# Altium PCB LPCB278R0__ASCII.PcbDoc
Units mm, origin at the board's own origin, x right, y up, seen from the top; angles counter-clockwise.
Board outline 96 x 79 mm, 2 copper layers (Top Layer, Bottom Layer); 75 components, 36 nets, 248 pads, 0 vias.
Unrouted connection lines stored in the file: 98.
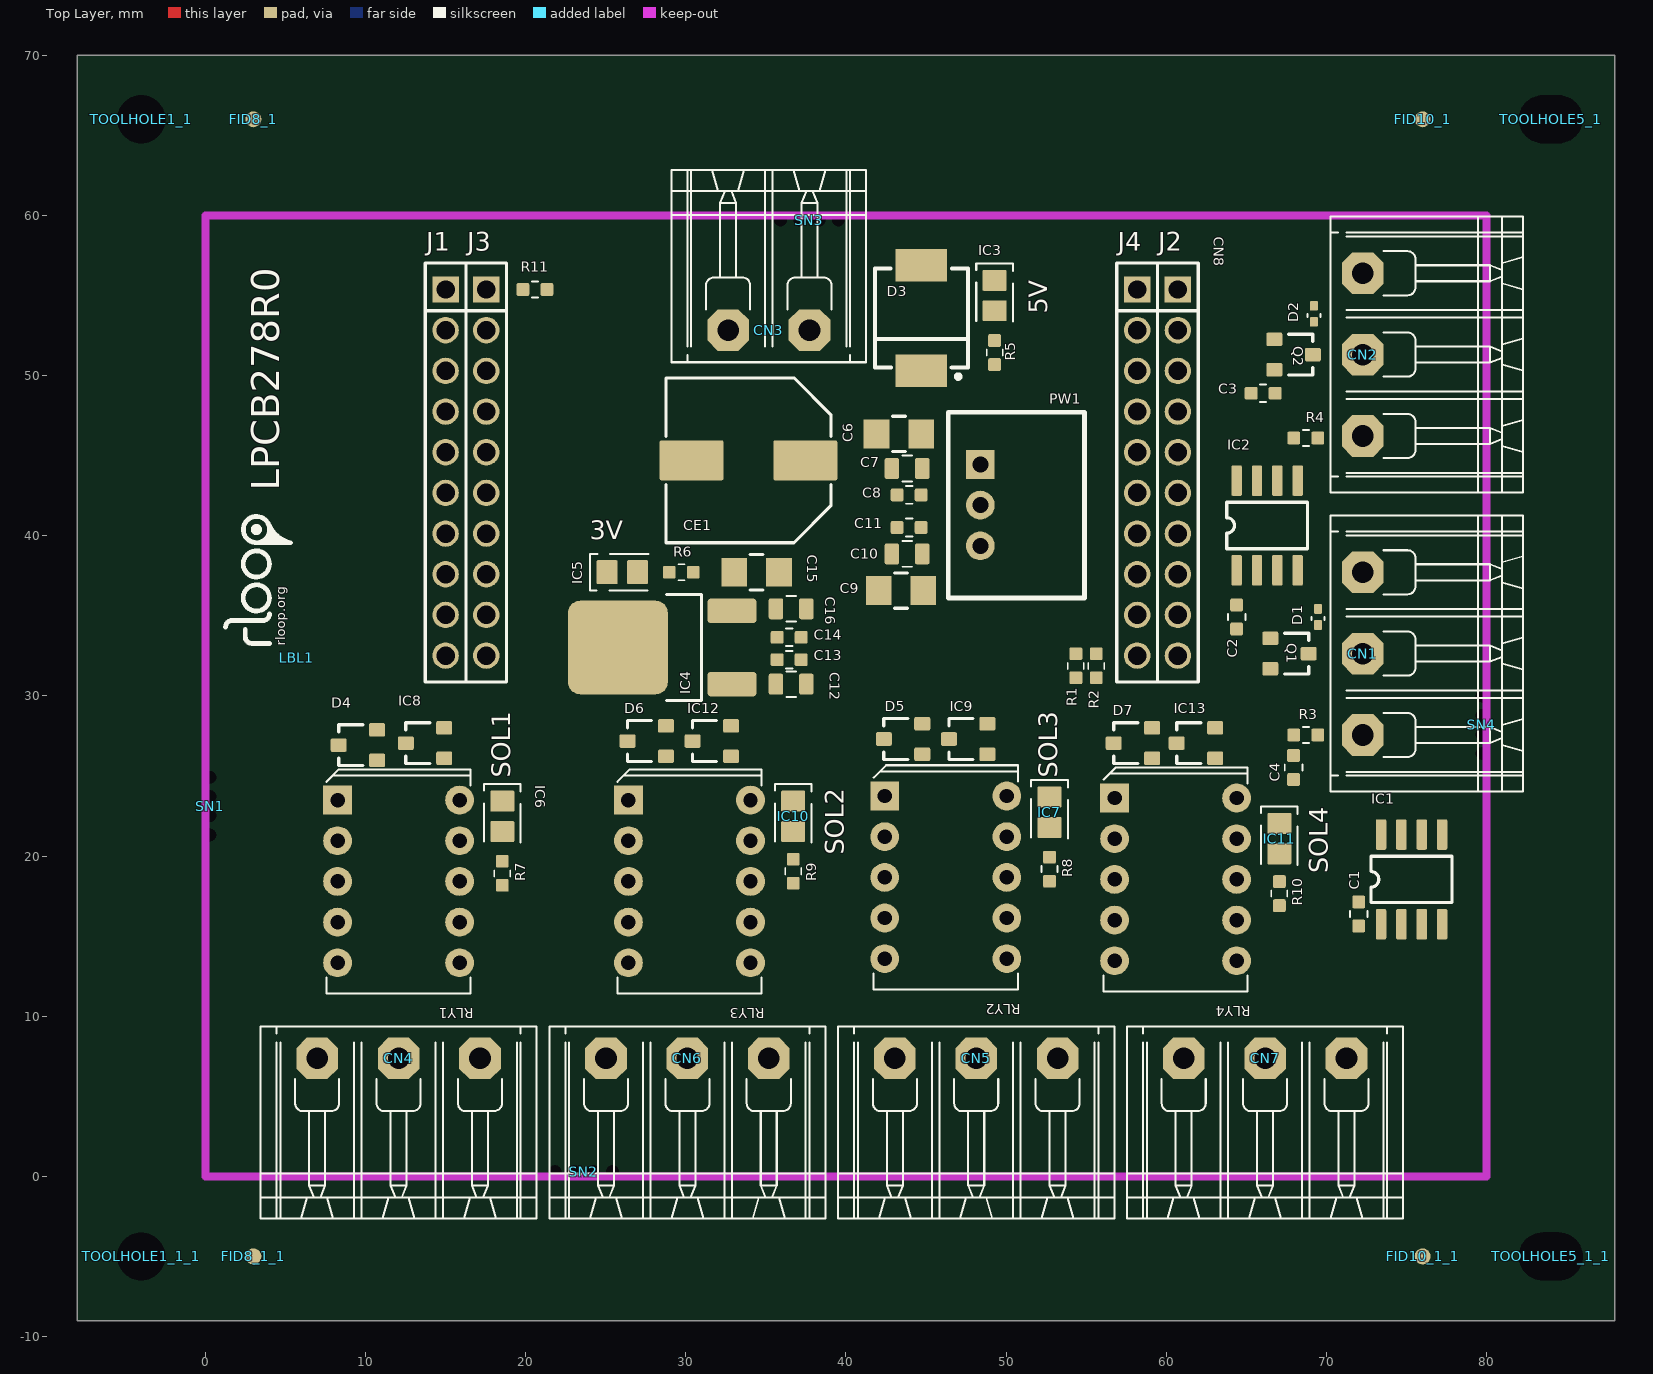
[diagram p0: Top Layer view]
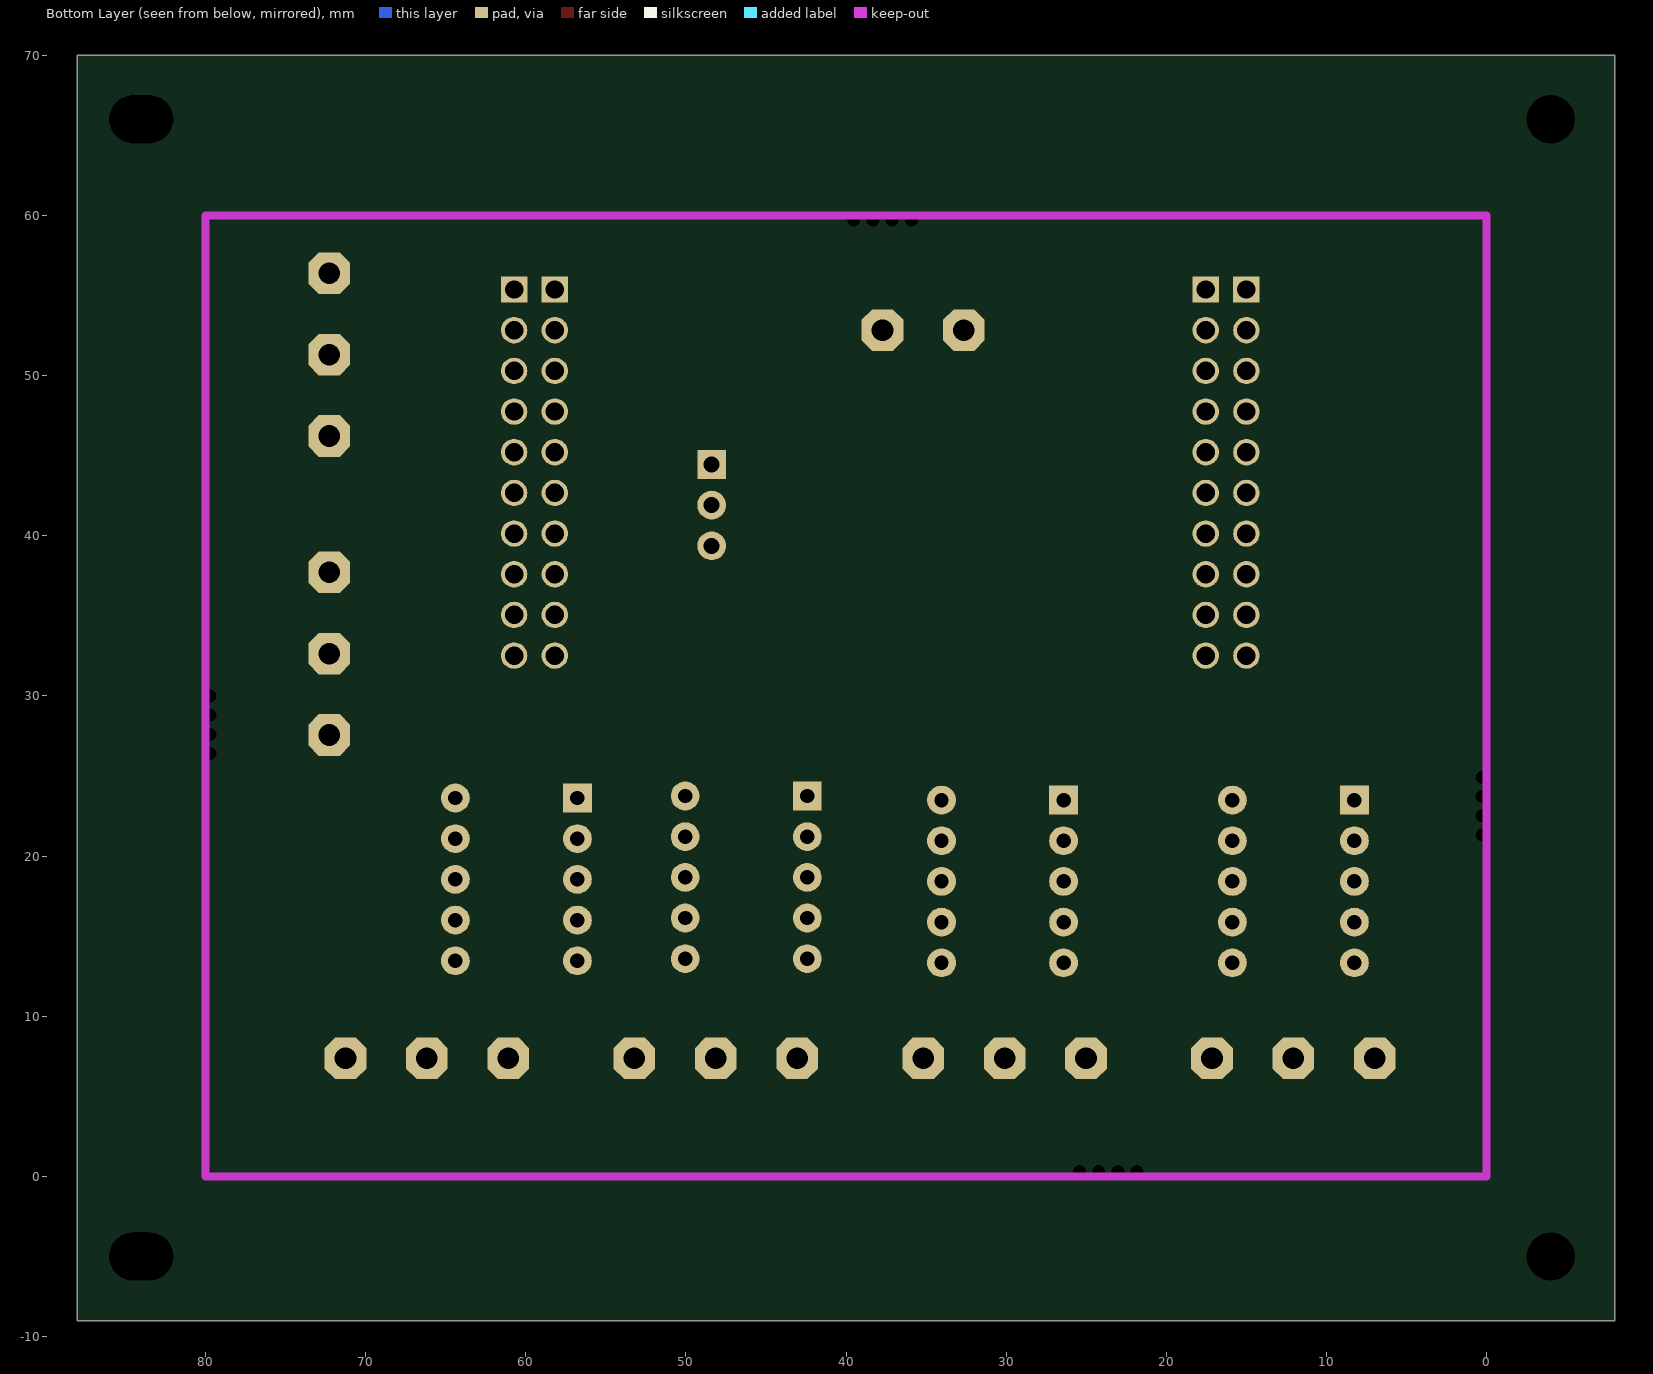
[diagram p1: Bottom Layer view, seen from below]

## Layer stack, top to bottom
Top Layer: signal copper 0.0356
Dielectric: dielectric 0.32, FR-4, Dk 4.8
Bottom Layer: signal copper 0.0356

## Board outline
-8,-9 -8,70 88,70 88,-9

## Design rules (kind name [scope] priority, off if disabled: settings)
AssemblyTestPointUsage [All] p0: scope1count=1 scope1_0_kind=Board scope1_0_value=Board scope2count=1 scope2_0_kind=Board scope2_0_value=Board commentlength=0
AssemblyTestpoint [All] p0: scope1count=1 scope1_0_kind=Board scope1_0_value=Board scope2count=1 scope2_0_kind=Board scope2_0_value=Board commentlength=0
Clearance [All] p0: scope1count=1 scope1_0_kind=Board scope1_0_value=Board scope2count=1 scope2_0_kind=Board scope2_0_value=Board commentlength=0 gap=0.16
Clearance [All] p1: gap=0.16
ComponentClearance [All] p0: scope1count=1 scope1_0_kind=Board scope1_0_value=Board scope2count=1 scope2_0_kind=Board scope2_0_value=Board commentlength=0 gap=0.254 collisioncheckmode=3
DiffPairsRouting [All] p0: scope1count=1 scope1_0_kind=Board scope1_0_value=Board scope2count=1 scope2_0_kind=Board scope2_0_value=Board commentlength=0
FabricationTestPointUsage [All] p0: scope1count=1 scope1_0_kind=Board scope1_0_value=Board scope2count=1 scope2_0_kind=Board scope2_0_value=Board commentlength=0 valid=0 allowmultiple=FALSE
FabricationTestpoint [All] p0: scope1count=1 scope1_0_kind=Board scope1_0_value=Board scope2count=1 scope2_0_kind=Board scope2_0_value=Board commentlength=0 side=3 testpointundercomponent=TRUE minsize=1.016 maxsize=2.54 preferedsize=1.524 minholesize=0 maxholesize=1.016 preferedholesize=0.813 testpointgrid=0.025
FanoutControl Fanout_Default [All] p0: scope1count=1 scope1_0_kind=Board scope1_0_value=Board scope2count=1 scope2_0_kind=Board scope2_0_value=Board commentlength=30 // Fanout_Default (Default Rule)
FanoutControl Fanout_Small [All] p0 off: scope1count=1 scope1_0_kind=Board scope1_0_value=Board scope2count=1 scope2_0_kind=Board scope2_0_value=Board commentlength=84 // Protel DXP Scope 1 Expression Was: (CompPinCount < 5)   Fanout_Small (Default Rule)
FanoutControl Fanout_SOIC [All] p0 off: scope1count=1 scope1_0_kind=Board scope1_0_value=Board scope2count=1 scope2_0_kind=Board scope2_0_value=Board commentlength=71 // Protel DXP Scope 1 Expression Was: IsSOIC   Fanout_SOIC (Default Rule)
FanoutControl Fanout_LCC [All] p0 off: scope1count=1 scope1_0_kind=Board scope1_0_value=Board scope2count=1 scope2_0_kind=Board scope2_0_value=Board commentlength=69 // Protel DXP Scope 1 Expression Was: IsLCC   Fanout_LCC (Default Rule)
FanoutControl Fanout_BGA [All] p0 off: scope1count=1 scope1_0_kind=Board scope1_0_value=Board scope2count=1 scope2_0_kind=Board scope2_0_value=Board commentlength=69 // Protel DXP Scope 1 Expression Was: IsBGA   Fanout_BGA (Default Rule)
Height [All] p0 off: scope1count=1 scope1_0_kind=Board scope1_0_value=Board scope2count=1 scope2_0_kind=Board scope2_0_value=Board commentlength=0
Height [All] p1 off: minheight=0 maxheight=25.4 prefheight=12.7
HoleSize [All] p0: scope1count=1 scope1_0_kind=Board scope1_0_value=Board scope2count=1 scope2_0_kind=Board scope2_0_value=Board commentlength=0 absolutevalues=TRUE maxlimit=6 minlimit=0.025 maxpercent=80.000 minpercent=20.000
HoleSize [All] p1: absolutevalues=TRUE maxlimit=6 minlimit=0.025 maxpercent=80.000 minpercent=20.000
HoleToHoleClearance [All] p0: scope1count=1 scope1_0_kind=Board scope1_0_value=Board scope2count=1 scope2_0_kind=Board scope2_0_value=Board commentlength=0
LayerPairs [All] p0: scope1count=1 scope1_0_kind=Board scope1_0_value=Board scope2count=1 scope2_0_kind=Board scope2_0_value=Board commentlength=0 enforce=TRUE
MinimumSolderMaskSliver [All] p0 off: scope1count=1 scope1_0_kind=Board scope1_0_value=Board scope2count=1 scope2_0_kind=Board scope2_0_value=Board commentlength=0
MinimumSolderMaskSliver [All] p1 off: minsoldermaskwidth=0.1
NetAntennae [All] p0: scope1count=1 scope1_0_kind=Board scope1_0_value=Board scope2count=1 scope2_0_kind=Board scope2_0_value=Board commentlength=0
PasteMaskExpansion [All] p0: scope1count=1 scope1_0_kind=Board scope1_0_value=Board scope2count=1 scope2_0_kind=Board scope2_0_value=Board commentlength=0 expansion=0
PlaneClearance [All] p0: scope1count=1 scope1_0_kind=Board scope1_0_value=Board scope2count=1 scope2_0_kind=Board scope2_0_value=Board commentlength=0 clearance=0.508
PlaneConnect [All] p0: scope1count=1 scope1_0_kind=Board scope1_0_value=Board scope2count=1 scope2_0_kind=Board scope2_0_value=Board commentlength=0 planeconnectstyle=Relief reliefexpansion=0.508 reliefentries=4 reliefconductorwidth=0.254 reliefairgap=0.254
PlaneConnect PlaneConnect_1 [All] p0 off: scope1count=1 scope1_0_kind=Board scope1_0_value=Board scope2count=1 scope2_0_kind=Board scope2_0_value=Board commentlength=44 planeconnectstyle=Direct reliefexpansion=0.508 reliefentries=4 reliefconductorwidth=0.254 reliefairgap=0.254 // Protel DXP Scope 1 Expression Was: IsVia
PlaneConnect PlaneConnect_1 [IsVia] p1: planeconnectstyle=Direct reliefexpansion=0.508 reliefentries=4 reliefconductorwidth=0.254 reliefairgap=0.254
PlaneConnect [All] p2: planeconnectstyle=Relief reliefexpansion=0.508 reliefentries=4 reliefconductorwidth=0.254 reliefairgap=0.254
PolygonConnect PolygonConnect_1 [All] p0: scope1count=1 scope1_0_kind=Board scope1_0_value=Board scope2count=1 scope2_0_kind=Board scope2_0_value=Board commentlength=0 connectstyle=Direct reliefconductorwidth=0.254 reliefentries=4 polygonreliefangle="90 Angle"
PolygonConnect [All] p0 off: scope1count=1 scope1_0_kind=Board scope1_0_value=Board scope2count=1 scope2_0_kind=Board scope2_0_value=Board commentlength=44 connectstyle=Direct reliefconductorwidth=0.254 reliefentries=4 polygonreliefangle="90 Angle" // Protel DXP Scope 1 Expression Was: IsVia
PolygonConnect [IsVia] p1: connectstyle=Direct reliefconductorwidth=0.254 reliefentries=4 polygonreliefangle="90 Angle" airgapwidth=0.254
PolygonConnect PolygonConnect_1 [All] p2: connectstyle=Direct reliefconductorwidth=0.254 reliefentries=4 polygonreliefangle="90 Angle" airgapwidth=0.254
RoomDefinition "U_LPCB278 - RM57 LAUNCH" [All] p0: scope1count=1 scope1_0_kind=ComponentClass scope1_0_value="U_LPCB278 - RM57 LAUNCH" scope2count=1 scope2_0_kind=Board scope2_0_value=Board commentlength=0 region_x1=127450000 region_y1=67650000 region_x2=141600000 region_y2=87450000 confinementstyle=ConfineIn
RoomDefinition "U_LPCB278 - RELAYS" [All] p0: scope1count=1 scope1_0_kind=ComponentClass scope1_0_value="U_LPCB278 - RELAYS" scope2count=1 scope2_0_kind=Board scope2_0_value=Board commentlength=0 region_x1=127500000 region_y1=60100000 region_x2=193550000 region_y2=67700000 confinementstyle=ConfineIn
RoomDefinition "U_LPCB278 - POWER" [All] p0: scope1count=1 scope1_0_kind=ComponentClass scope1_0_value="U_LPCB278 - POWER" scope2count=1 scope2_0_kind=Board scope2_0_value=Board commentlength=0 region_x1=127500000 region_y1=54700000 region_x2=167850000 region_y2=60200000 confinementstyle=ConfineIn
RoomDefinition "U_LPCB278 - 1 WIRE" [All] p0: scope1count=1 scope1_0_kind=ComponentClass scope1_0_value="U_LPCB278 - 1 WIRE" scope2count=1 scope2_0_kind=Board scope2_0_value=Board commentlength=0 region_x1=127450000 region_y1=46600000 region_x2=157900000 region_y2=54200000 confinementstyle=ConfineIn
RoomDefinition "LPCB278 - TOP" [All] p0: scope1count=1 scope1_0_kind=ComponentClass scope1_0_value="LPCB278 - TOP" scope2count=1 scope2_0_kind=Board scope2_0_value=Board commentlength=0 region_x1=127500000 region_y1=44200000 region_x2=129750000 region_y2=46700000 confinementstyle=ConfineIn
RoomDefinition "U_LPCB278 - RM57 LAUNCH" [InComponentClass('U_LPCB278 - RM57 LAUNCH')] p1: confinementstyle=ConfineIn formatcopy=TRUE lockcomponents=FALSE outline 169.038,50.563 204.979,50.563 204.979,100.855 169.038,100.855
RoomDefinition "U_LPCB278 - RELAYS" [InComponentClass('U_LPCB278 - RELAYS')] p2: confinementstyle=ConfineIn formatcopy=TRUE lockcomponents=FALSE outline 169.165,31.386 336.932,31.386 336.932,50.69 169.165,50.69
RoomDefinition "U_LPCB278 - POWER" [InComponentClass('U_LPCB278 - POWER')] p3: confinementstyle=ConfineIn formatcopy=TRUE lockcomponents=FALSE outline 169.165,17.67 271.654,17.67 271.654,31.64 169.165,31.64
RoomDefinition "U_LPCB278 - 1 WIRE" [InComponentClass('U_LPCB278 - 1 WIRE')] p4: confinementstyle=ConfineIn formatcopy=TRUE lockcomponents=FALSE outline 169.038,-2.904 246.381,-2.904 246.381,16.4 169.038,16.4
RoomDefinition "LPCB278 - TOP" [InComponentClass('LPCB278 - TOP')] p5: confinementstyle=ConfineIn formatcopy=TRUE lockcomponents=FALSE outline 169.165,-9 174.88,-9 174.88,-2.65 169.165,-2.65
RoutingCorners [All] p0: scope1count=1 scope1_0_kind=Board scope1_0_value=Board scope2count=1 scope2_0_kind=Board scope2_0_value=Board commentlength=0 cornerstyle=45-Degree minsetback=2.54 maxsetback=2.54
RoutingLayers [All] p0: scope1count=1 scope1_0_kind=Board scope1_0_value=Board scope2count=1 scope2_0_kind=Board scope2_0_value=Board commentlength=0 top layer=Automatic bottom layer=Automatic
RoutingPriority [All] p0: scope1count=1 scope1_0_kind=Board scope1_0_value=Board scope2count=1 scope2_0_kind=Board scope2_0_value=Board commentlength=0
RoutingTopology [All] p0: scope1count=1 scope1_0_kind=Board scope1_0_value=Board scope2count=1 scope2_0_kind=Board scope2_0_value=Board commentlength=0 topology=Shortest
RoutingVias [All] p0: scope1count=1 scope1_0_kind=Board scope1_0_value=Board scope2count=1 scope2_0_kind=Board scope2_0_value=Board commentlength=0 holewidth=0.6 width=1.2 viastyle="Through Hole" minholewidth=0.3 minwidth=0.6 maxholewidth=1 maxwidth=2
RoutingVias [All] p1: holewidth=0.6 width=1.2 viastyle="Through Hole" minholewidth=0.3 minwidth=0.6 maxholewidth=1 maxwidth=2
ShortCircuit [All] p0: scope1count=1 scope1_0_kind=Board scope1_0_value=Board scope2count=1 scope2_0_kind=Board scope2_0_value=Board commentlength=0 allowed=FALSE
SilkToSilkClearance [All] p0 off: scope1count=1 scope1_0_kind=Board scope1_0_value=Board scope2count=1 scope2_0_kind=Board scope2_0_value=Board commentlength=0
SilkToSilkClearance [All] p1 off: silktosilkclearance=0.1
SilkToSolderMaskClearance [All] p0 off: scope1count=1 scope1_0_kind=Board scope1_0_value=Board scope2count=1 scope2_0_kind=Board scope2_0_value=Board commentlength=44 // Protel DXP Scope 1 Expression Was: IsPad
SilkToSolderMaskClearance [IsPad] p1 off: minsilkscreentomaskgap=0.1 clearancetoexposedcopper=TRUE
SolderMaskExpansion [All] p0: scope1count=1 scope1_0_kind=Board scope1_0_value=Board scope2count=1 scope2_0_kind=Board scope2_0_value=Board commentlength=0 expansion=0.102
SolderMaskExpansion [All] p1: expansion=0.102
UnRoutedNet [All] p0: scope1count=1 scope1_0_kind=Board scope1_0_value=Board scope2count=1 scope2_0_kind=Board scope2_0_value=Board commentlength=0
Width [All] p0: scope1count=1 scope1_0_kind=Board scope1_0_value=Board scope2count=1 scope2_0_kind=Board scope2_0_value=Board commentlength=0 maxlimit=1 minlimit=0.16 preferedwidth=0.2
Width [All] p1: maxlimit=1 minlimit=0.16 preferedwidth=0.2
22 further rules are at their usual default settings.

## Classes and differential pairs
component class "U_LPCB278 - RM57 LAUNCH": CN8 R11
component class "U_LPCB278 - RELAYS": CN4 CN5 CN6 CN7 D4 D5 D6 D7 IC6 IC7 IC8 IC9 IC10 IC11 IC12 IC13 R7 R8 R9 R10 RLY1 RLY2 RLY3 RLY4
component class "U_LPCB278 - POWER": C6 C7 C8 C9 C10 C11 C12 C13 C14 C15 C16 CE1 CN3 D3 IC3 IC4 IC5 PW1 R5 R6
component class "U_LPCB278 - 1 WIRE": C1 C2 C3 C4 CN1 CN2 D1 D2 IC1 IC2 Q1 Q2 R1 R2 R3 R4
component class "LPCB278 - TOP": LBL1 SN1 SN2 SN3 SN4

## Components (designator, comment, footprint, x,y, rotation, side; value= is the part's Value field where it differs from the comment)
C1 "100n / 50V / 10% / SMD 0603" LFP011__CC1608-0603-IPC7351_B 72.009,16.383 r90 top
C2 "100n / 50V / 10% / SMD 0603" LFP011__CC1608-0603-IPC7351_B 64.389,34.925 r270 top
C3 "1uF / 10V / 10% / SMD 0603" LFP011__CC1608-0603-IPC7351_B 66.04,48.895 r180 top
C4 "1uF / 10V / 10% / SMD 0603" LFP011__CC1608-0603-IPC7351_B 67.945,25.527 r270 top
C6 "10uF / 50V / 10% / SMD 1206" LFP043__CC3216-1206 43.307,46.355 r180 top
C7 "1uF / 50V / 10% / SMD 0805" LFP010__CC2012-0805-IPC7351_B 43.815,44.196 r180 top
C8 "100nF / 50V / 10% / SMD 0603" LFP011__CC1608-0603-IPC7351_B 43.942,42.545 r180 top
C9 "10uF / 50V / 10% / SMD 1206" LFP043__CC3216-1206 43.434,36.576 r180 top
C10 "1uF / 50V / 10% / SMD 0805" LFP010__CC2012-0805-IPC7351_B 43.815,38.862 r180 top
C11 "100nF / 50V / 10% / SMD 0603" LFP011__CC1608-0603-IPC7351_B 43.942,40.513 r180 top
C12 "1uF / 50V / 10% / SMD 0805" LFP010__CC2012-0805-IPC7351_B 36.576,30.734 r0 top
C13 "100nF / 50V / 10% / SMD 0603" LFP011__CC1608-0603-IPC7351_B 36.449,32.258 r0 top
C14 "100nF / 50V / 10% / SMD 0603" LFP011__CC1608-0603-IPC7351_B 36.449,33.655 r0 top
C15 "10uF / 50V / 10% / SMD 1206" LFP043__CC3216-1206 34.417,37.719 r0 top
C16 "1uF / 50V / 10% / SMD 0805" LFP010__CC2012-0805-IPC7351_B 36.576,35.433 r0 top
CE1 "330uF / 35V / 20% / SMD 10x10" LFP041__NICHICON_WT_10X10 33.909,44.704 r180 top
CN1 "691 313 510 003" "691 313 510 003" 72.263,27.559 r90 top locked
CN2 "691 313 510 003" "691 313 510 003" 72.263,46.228 r90 top locked
CN3 "691 313 510 002" "691 313 510 002" 37.719,52.832 r180 top
CN4 "691 313 510 003" "691 313 510 003" 6.985,7.366 r0 top locked
CN5 "691 313 510 003" "691 313 510 003" 43.053,7.366 r0 top locked
CN6 "691 313 510 003" "691 313 510 003" 25.019,7.366 r0 top locked
CN7 "691 313 510 003" "691 313 510 003" 61.087,7.366 r0 top locked
CN8 "RM57LAUNCHXL_BP_40P_1" RM57LAUNCHXL_BP_40P_1 15,55.372 r0 top locked
D1 "TPD1E10B09" LFP157__R-PX1SON-N2 69.469,34.925 r270 top
D2 "TPD1E10B09" LFP157__R-PX1SON-N2 69.215,53.848 r270 top
D3 "S3M-E3/57T" LFP040__DO-214AB 44.704,53.594 r90 top
D4 "BAS16" LFP021__SOT23 9.525,26.924 r90 top
D5 "BAS16" LFP021__SOT23 43.561,27.305 r90 top
D6 "BAS16" LFP021__SOT23 27.559,27.178 r90 top
D7 "BAS16" LFP021__SOT23 57.912,27.051 r90 top
FID8_1 "FIDUCIAL" LFP113__FIDUCIAL 3,66 r0 top
FID8_1_1 "FIDUCIAL" LFP113__FIDUCIAL 3,-5 r0 top
FID10_1 "FIDUCIAL" LFP113__FIDUCIAL 76,66 r0 top
FID10_1_1 "FIDUCIAL" LFP113__FIDUCIAL 76,-5 r0 top
IC1 "DS2482S-100+T&R" LFP069__R-8G 75.311,18.542 r0 top
IC2 "DS2482S-100+T&R" LFP069__R-8G 66.294,40.64 r0 top
IC3 "EL-17-21VGC/TR8" CR2012-0805-LED 49.276,54.991 r270 top
IC4 "NCV4274DT33RKG" LFP019__369A-13 28.321,33.02 r90 top
IC5 "EL-17-21VGC/TR8" CR2012-0805-LED 26.035,37.719 r0 top
IC6 "EL-17-21VGC/TR8" CR2012-0805-LED 18.542,22.479 r270 top
IC7 "EL-17-21VGC/TR8" CR2012-0805-LED 52.705,22.733 r270 top
IC8 "NUD3124LT1G" LFP021__SOT23 13.716,27.051 r90 top
IC9 "NUD3124LT1G" LFP021__SOT23 47.625,27.305 r90 top
IC10 "EL-17-21VGC/TR8" CR2012-0805-LED 36.703,22.479 r270 top
IC11 "EL-17-21VGC/TR8" CR2012-0805-LED 67.056,21.082 r270 top
IC12 "NUD3124LT1G" LFP021__SOT23 31.623,27.178 r90 top
IC13 "NUD3124LT1G" LFP021__SOT23 61.849,27.051 r90 top
LBL1 "RLOOP_LOGO" RLOOP_LOGO 5.715,32.385 r90 top
PW1 "173010542" 173010542 48.387,41.91 r270 top
Q1 "BSS84" LFP021__SOT23 67.691,32.639 r270 top
Q2 "BSS84" LFP021__SOT23 67.945,51.308 r270 top
R1 "4.7K / 0.1W / 1% / SMD 0603" LFP020__CR1608-0603-IPC7351_B 54.356,31.877 r270 top
R2 "4.7K / 0.1W / 1% / SMD 0603" LFP020__CR1608-0603-IPC7351_B 55.626,31.877 r270 top
R3 "0R / 0.1W / SMD 0603" LFP020__CR1608-0603-IPC7351_B 68.707,27.559 r0 top
R4 "0R / 0.1W / SMD 0603" LFP020__CR1608-0603-IPC7351_B 68.707,46.101 r0 top
R5 "2.2K / 0.1W / 1% / SMD 0603" LFP020__CR1608-0603-IPC7351_B 49.276,51.435 r270 top
R6 "2.2K / 0.1W / 1% / SMD 0603" LFP020__CR1608-0603-IPC7351_B 29.718,37.719 r0 top
R7 "2.2K / 0.1W / 1% / SMD 0603" LFP020__CR1608-0603-IPC7351_B 18.542,18.923 r90 top
R8 "2.2K / 0.1W / 1% / SMD 0603" LFP020__CR1608-0603-IPC7351_B 52.705,19.177 r90 top
R9 "2.2K / 0.1W / 1% / SMD 0603" LFP020__CR1608-0603-IPC7351_B 36.703,19.05 r90 top
R10 "2.2K / 0.1W / 1% / SMD 0603" LFP020__CR1608-0603-IPC7351_B 67.056,17.653 r90 top
R11 "0R / 0.1W / SMD 0603" LFP020__CR1608-0603-IPC7351_B 20.574,55.372 r0 top
RLY1 "TQ2-24" TQ2 12.065,18.415 r270 top
RLY2 "TQ2-24" TQ2 46.228,18.669 r270 top
RLY3 "TQ2-24" TQ2 30.226,18.415 r270 top
RLY4 "TQ2-24" TQ2 60.579,18.542 r270 top
SN1 "PCB_SNAPOUT_0.3MM" PCB_SNAPOUT_0.3MM 0,23.114 r270 top
SN2 "PCB_SNAPOUT_0.3MM" PCB_SNAPOUT_0.3MM 23.622,0 r0 top
SN3 "PCB_SNAPOUT_0.3MM" PCB_SNAPOUT_0.3MM 37.719,60 r180 top
SN4 "PCB_SNAPOUT_0.3MM" PCB_SNAPOUT_0.3MM 80,28.194 r90 top
TOOLHOLE1_1 "Comment" TOOL-1#1 -4,66 r0 top
TOOLHOLE1_1_1 "Comment" TOOL-1#1 -4,-5 r0 top
TOOLHOLE5_1 "Comment" TOOL-1#2 84,66 r0 top
TOOLHOLE5_1_1 "Comment" TOOL-1#2 84,-5 r0 top

## Footprints (in the part's own frame and the unit in brackets; to place one, negate y for a bottom-side part, rotate by r counter-clockwise, add the part's x,y. Pads: shape width x height; smd on the part's side, far side on the other; paste and mask are expansions set on the pad)
"691 313 510 002" [mm] "Connector, Pluggable Terminal Block, 5.08mm, 2 Way, PTH"
  oct 2.6x2.6 hole 1.35: 1(0,0) 2(5.08,0)
  silkscreen extent -3.54,-10 8.62,2
"691 313 510 003" [mm] "Connector, Pluggable Terminal Block, 5.08mm, 3 Way, PTH"
  oct 2.6x2.6 hole 1.35: 1(0,0) 2(5.08,0) 3(10.16,0)
  silkscreen extent -3.54,-10 13.7,2
173010542 [mm]
  rect 1.8x1.8 hole 1 paste-0.01: 1(-2.54,0)
  round 1.8 hole 1 paste-0.01: 2(0,0) 3(2.54,0)
  silkscreen extent -5.8,-2 5.8,6.5
CR2012-0805-LED [mm]
  rrect10% 1.3x1.5 smd paste-0.05: A(0.95,0) K(-0.95,0)
  silkscreen extent -2.01,-1.14 1.63,1.14
LFP010__CC2012-0805-IPC7351_B [mm]
  rrect25% 0.9x1.3 smd paste-0.01: 1(-0.95,0) 2(0.95,0)
  silkscreen extent -0.3,-0.8 0.3,0.8
LFP011__CC1608-0603-IPC7351_B [mm]
  rrect25% 0.8x0.8 smd: 1(-0.75,0) 2(0.75,0)
  silkscreen extent -0.2,-0.55 0.2,0.55
LFP019__369A-13 [mil]
  rrect25% 60x120 smd: 1(-90,-179.49) 3(90,-179.49)
  rrect25% 230x245 smd paste-196.85: 4(0,100.75)
  silkscreen extent -130,-104 130,-19
LFP020__CR1608-0603-IPC7351_B [mm]
  rrect25% 0.8x0.8 smd: 1(-0.75,0) 2(0.75,0)
  silkscreen extent -0.2,-0.5 0.2,0.5
LFP021__SOT23 [mm] "SOT-23; 3 Leads; Body 3.0 x 2.5 mm, inc. leads (LxW max)"
  rrect25% 0.85x1 smd paste-0.05: 1(-0.95,-1.2) 2(0.95,-1.2) 3(0,1.2)
  silkscreen extent -1.27,-0.3 1.28,1.2
LFP040__DO-214AB [mm]
  rect 2.032x3.2 smd: 1(-3.3,0) 2(3.3,0)
  silkscreen extent -3.8,-2.9 3.1,2.9
LFP041__NICHICON_WT_10X10 [mm]
  rrect10% 4x2.5 smd paste-0.02: 1(-3.55,0) 2(3.55,0)
  silkscreen extent -5.15,-5.15 5.15,5.15
LFP043__CC3216-1206 [mm]
  rect 1.6x1.8 smd paste-0.01: 1(-1.4,0) 2(1.4,0)
  silkscreen extent -0.4,-1.1 0.4,1.1
LFP069__R-8G [mm] "Small Outline; 8 Leads; Body Width 3.9 mm; Pitch 1.27 mm"
  rrect25% 0.65x1.9 smd paste-0.05: 1(-1.905,-2.8) 2(-0.635,-2.8) 3(0.635,-2.8) 4(1.905,-2.8) 5(1.905,2.8) 6(0.635,2.8) 7(-0.635,2.8) 8(-1.905,2.8)
  silkscreen extent -2.52,-1.45 2.52,1.45
LFP113__FIDUCIAL [mm]
  round 1 smd paste-2 mask+1.5: 0(0,0)
LFP157__R-PX1SON-N2 [mm]
  rrect25% 0.6x0.5 smd: 2(0.5,0) G(-0.5,0)
  silkscreen extent 0,-0.4 0.2,0.4
PCB_SNAPOUT_0.3MM [mm]
  round 0.4 hole 0.8 unplated: 0(-1.8,0.3) 0(-0.6,0.3) 0(0.6,0.3) 0(1.8,0.3)
RLOOP_LOGO [mm]
  silkscreen extent 0.89,0.39 8.82,4.45
RM57LAUNCHXL_BP_40P_1 [mm]
  rect 1.65x1.65 hole 1.15: J1_1(0,0) J2_1(45.72,0) J3_1(2.54,0) J4_1(43.18,0)
  round 1.65 hole 1.15: J1_2(0,-2.54) J1_3(0,-5.08) J1_4(0,-7.62) J1_5(0,-10.16) J1_6(0,-12.7) J1_7(0,-15.24) J1_8(0,-17.78) J1_9(0,-20.32) J1_10(0,-22.86) J2_2(45.72,-2.54) J2_3(45.72,-5.08) J2_4(45.72,-7.62) J2_5(45.72,-10.16) J2_6(45.72,-12.7) J2_7(45.72,-15.24) J2_8(45.72,-17.78) J2_9(45.72,-20.32) J2_10(45.72,-22.86) J3_2(2.54,-2.54) J3_3(2.54,-5.08) J3_4(2.54,-7.62) J3_5(2.54,-10.16) J3_6(2.54,-12.7) J3_7(2.54,-15.24) J3_8(2.54,-17.78) J3_9(2.54,-20.32) J3_10(2.54,-22.86) J4_2(43.18,-2.54) J4_3(43.18,-5.08) J4_4(43.18,-7.62) J4_5(43.18,-10.16) J4_6(43.18,-12.7) J4_7(43.18,-15.24) J4_8(43.18,-17.78) J4_9(43.18,-20.32) J4_10(43.18,-22.86)
  silkscreen extent -1.27,-24.51 46.99,1.65
TOOL-1#1 [mm]
  round 2.54 hole 3 unplated: TOOL(0,0)
TOOL-1#2 [mm]
  round 0.076 hole 3 slot 4 at 0 deg unplated: TOOL1(0,0)
TQ2 [mm]
  rect 1.8x1.8 hole 0.9: 1(-5.08,-3.81)
  round 1.8 hole 0.9: 2(-2.54,-3.81) 3(0,-3.81) 4(2.54,-3.81) 5(5.08,-3.81) 6(5.08,3.81) 7(2.54,3.81) 8(0,3.81) 9(-2.54,3.81) 10(-5.08,3.81)
  silkscreen extent -7,-4.5 7,4.5

## Part data
C1 C2 C8 C11 C13 C14: "Capacitor, Ceramic Chip, 100nF (0.1uF), 50V, 5%, SMD 0603 [LCA016]"
C3 C4: "Capacitor, Ceramic Chip, 1uF, 10V, SMD 0603 [LCA070]"
C6 C9 C15: "Capacitor, Ceramic Chip, 10uF, 50V, X5R, 10%, SMD 1206 [LCA144]"
C7 C10 C12 C16: "Capacitor, Ceramic Chip, 1uF, 50V, SMD 0805 [LCA098]"
CE1: "Capacitor, Aluminum Electrolytic, 330uF, 35V, 20%, SMD (10mm x 10mm) [LCA071]"
CN1 CN2 CN4 CN5 CN6 CN7: "Connector, Pluggable Terminal Block, 5.08mm, 3 Way, PTH"
CN3: "Connector, Pluggable Terminal Block, 5.08mm, 2 Way, PTH"
CN8: "Connector, RM57L843 LaunchXL, 40Pin Boosterpack Site1"
D1 D2: "Diode, ESD Protecion, 10pF, 9V Breakdown, SMD 0402 [LIC621]"
D3: "Diode, General Purpose Rectifier, 3A, 200V, SMD DO-214AB [LIC189]"
D4 D5 D6 D7: "Diode, Small Signal, 0.2A, 85V, SMD SOT-23 [LIC006]"
IC1 IC2: "IC, I2C to 1 Wire Bridge, SMD SOIC8"
IC3 IC5 IC6 IC7 IC10 IC11: "LED, SMD, 0805 Green [LIC016]"
IC4: "IC, Voltage Regulator, 400mA, 3.3V LDO, SMD DPAK [LIC233]"
IC8 IC9 IC12 IC13: "IC, Relay Driver, 28V Industrial, SMD SOT23 [LIC292]"
Q1 Q2: "FET, P Channel, Logic Level, SMD SOT23 [LIC215]"
R1 R2: "Resistor, Ceramic Chip, 4K7, 0.1W, 1%, SMD 0603 [LRE058]"
R3 R4 R11: "Resistor, Ceramic Chip, 0R, 0.1W, SMD 0603 [LRE026]"
R5 R6 R7 R8 R9 R10: "Resistor, Ceramic Chip, 2.2K, 0.1W, 1%, SMD 0603 [LRE027]"
RLY1 RLY2 RLY3 RLY4: "Relay, DPDT, Non Latching, 24VDC Coil, 1A Rating, PTH"
SN1 SN2 SN3 SN4: "PCB Snapout + 0.3mm"

## Nets (pads, with @x,y where several pads share a name; then routed paths per layer and width w, separated by ;. In a path a pad name is that pad's centre, name@x,y a point inside that pad or via, vN(x,y) a via of type N, cw(c..) or ccw(c..) an arc to the next point about the centre after c; other vN are vias at no path point)
D3V3: C1.1 C2.1 C3.1 C4.1 C14.1 C15.1 C16.1 IC1.1 IC2.1 IC2.8 IC4.3 Q1.2 Q2.2 R1.2 R2.2 R3.1 R4.1 R6.2
DGND: C1.2 C2.2 C3.2 C4.2 C6.2 C7.2 C8.2 C9.2 C10.2 C11.2 C12.2 C13.2 C14.2 C15.2 C16.2 CE1.2 CN1.3 CN2.3 CN3.2 CN4.2 CN5.2 CN6.2 CN7.2 CN8.J2_1 CN8.J3_2 D1.G D2.G IC1.3 IC1.7 IC1.8 IC2.3 IC2.7 IC3.K IC4.4 IC5.K IC8.2 IC9.2 IC12.2 IC13.2 PW1.2 RLY1.3 RLY1.8 RLY2.3 RLY2.8 RLY3.3 RLY3.8 RLY4.3 RLY4.8
I2C_SCL: CN8.J2_9 IC1.4 IC2.4 R2.1
I2C_SDA: CN8.J2_8 IC1.5 IC2.5 R1.1
NetCN1_1: CN1.1 R3.2
NetCN1_2: CN1.2 D1.2 IC1.2 Q1.3
NetCN2_1: CN2.1 R4.2
NetCN2_2: CN2.2 D2.2 IC2.2 Q2.3
NetCN3_1: CN3.1 D3.2
NetCN4_1: CN4.1 RLY1.2 RLY1.9
NetCN4_3: CN4.3 RLY1.4 RLY1.7
NetCN5_1: CN5.1 RLY2.2 RLY2.9
NetCN5_3: CN5.3 RLY2.4 RLY2.7
NetCN6_1: CN6.1 RLY3.2 RLY3.9
NetCN6_3: CN6.3 RLY3.4 RLY3.7
NetCN7_1: CN7.1 RLY4.2 RLY4.9
NetCN7_3: CN7.3 RLY4.4 RLY4.7
NetCN8_J3_1: CN8.J3_1 R11.1
NetD4_1: D4.1 IC6.K IC8.3 RLY1.10
NetD5_1: D5.1 IC7.K IC9.3 RLY2.10
NetD6_1: D6.1 IC10.K IC12.3 RLY3.10
NetD7_1: D7.1 IC11.K IC13.3 RLY4.10
NetIC1_6: IC1.6 Q1.1
NetIC2_6: IC2.6 Q2.1
NetIC3_A: IC3.A R5.1
NetIC5_A: IC5.A R6.1
NetIC6_A: IC6.A R7.2
NetIC7_A: IC7.A R8.2
NetIC10_A: IC10.A R9.2
NetIC11_A: IC11.A R10.2
P5V: C9.1 C10.1 C11.1 PW1.3 R11.2
P24V: C6.1 C7.1 C8.1 C12.1 C13.1 CE1.1 D3.1 D4.3 D5.3 D6.3 D7.3 IC4.1 PW1.1 R5.2 R7.1 R8.1 R9.1 R10.1 RLY1.1 RLY2.1 RLY3.1 RLY4.1
RELAY_1: CN8.J4_10 IC8.1
RELAY_2: CN8.J4_9 IC12.1
RELAY_3: CN8.J4_8 IC9.1
RELAY_4: CN8.J4_7 IC13.1
pads on no net: CN8.J1_1 CN8.J1_2 CN8.J1_3 CN8.J1_4 CN8.J1_5 CN8.J1_6 CN8.J1_7 CN8.J1_8 CN8.J1_9 CN8.J1_10 CN8.J2_2 CN8.J2_3 CN8.J2_4 CN8.J2_5 CN8.J2_6 CN8.J2_7 CN8.J2_10 CN8.J3_3 CN8.J3_4 CN8.J3_5 CN8.J3_6 CN8.J3_7 CN8.J3_8 CN8.J3_9 CN8.J3_10 CN8.J4_1 CN8.J4_2 CN8.J4_3 CN8.J4_4 CN8.J4_5 CN8.J4_6 D4.2 D5.2 D6.2 D7.2 FID8_1.0 FID8_1_1.0 FID10_1.0 FID10_1_1.0 RLY1.5 RLY1.6 RLY2.5 RLY2.6 RLY3.5 RLY3.6 RLY4.5 RLY4.6 SN1.0 SN2.0 SN3.0 SN4.0 TOOLHOLE1_1.TOOL TOOLHOLE1_1_1.TOOL TOOLHOLE5_1.TOOL1 TOOLHOLE5_1_1.TOOL1

## Keep-outs
Keep-Out Layer:
  lines w0.5: 0,0 80,0 80,60 0,60 0,0

## Silkscreen, mask and mechanical layers (free items; w line width, h text height)
Top Overlay:
  text "5V" at 52.959,53.848 h2 r90
  text "LPCB278R0" at 5.207,42.799 h3 r90
  text "3V" at 24.003,39.37 h2
  text "SOL1" at 19.431,24.892 h2 r90
  text "SOL3" at 53.594,24.892 h2 r90
  text "SOL2" at 40.259,20.066 h2 r90
  text "SOL4" at 70.485,18.923 h2 r90
Top Paste:
  lines w1: -22.647,-45.577 177.353,-45.577 177.353,167.423 -22.647,167.423 -22.647,-45.577
Mechanical 1:
  lines w0.1: -8,-9 -8,70 88,70 88,-9 -8,-9
  lines w0.127: 0,0 0,60 80,60 80,0 0,0
Mechanical 3:
  lines w2.4: -1.2,20.009 -1.2,-1.2 20.644,-1.2 ; -1.2,26.105 -1.2,61.2 34.741,61.2 ; 26.105,-1.2 81.2,-1.2 81.2,25.597 ; 40.837,61.2 81.2,61.2 81.2,31.693
Mechanical 4:
  lines w0.203: 74.158,-74.783 112.099,-74.783 ; 112.059,-85.215 74.167,-85.223 74.167,-53.219 112.059,-53.215 ; 112.099,-85.222 112.099,-53.222
  lines w0.305: 112.751,-82.533 188.696,-82.536 ; 112.751,-78.533 188.696,-78.523 ; 112.751,-74.777 188.696,-74.793 ; 112.756,-74.77 188.701,-74.786 ; 112.756,-71.045 188.701,-71.048 ; 112.756,-67.045 188.701,-67.035 ; 112.756,-63.045 188.701,-63.047 ; 113.059,-59.215 188.559,-59.215 264.559,-59.215 ; 113.059,-58.715 188.559,-58.715 ; 125.349,-85.972 125.349,-53.222 ; 138.099,-85.972 138.099,-53.222 ; 150.849,-85.972 150.849,-53.222 ; 162.849,-85.972 162.849,-53.222 ; 177.215,-86.01 177.215,-53.244 ; 188.701,-78.544 264.698,-78.544 ; 188.726,-71.051 264.749,-71.051 ; 199.904,-86.037 199.904,-78.544 ; 218.724,-86.037 218.724,-78.544 ; 242.617,-86.09 242.617,-78.507 ; 242.701,-78.544 242.701,-71.051
  lines w0.508: -120.29,-46.032 -115.286,-46.032 ; -120.29,-1.049 -115.286,-1.049 ; -120.29,43.935 -115.286,43.935 ; -120.29,88.943 -115.286,88.943 ; -120.29,133.927 -115.286,133.927 ; -55.291,-91.041 -55.291,-86.037 ; -55.291,173.957 -55.291,178.961 ; -2.993,173.957 -2.993,178.961 ; 9.707,-91.041 9.707,-86.037 ; 55.343,173.969 55.343,178.973 ; 74.706,-91.041 74.706,-86.037 ; 112.809,-85.965 112.809,-53.215 264.559,-53.215 ; 139.704,-91.041 139.704,-86.037 ; 139.704,173.957 139.704,178.961 ; 188.697,-53.259 188.701,-86.037 ; 204.703,-91.041 204.703,-86.037 ; 204.703,173.957 204.703,178.961 ; 264.698,-46.032 269.702,-46.032 ; 264.698,-1.049 269.702,-1.049 ; 264.723,43.935 269.702,43.935 ; 264.723,88.943 269.702,88.943 ; 264.723,133.927 269.702,133.927 ; -120.29,-91.041 269.702,-91.041 269.702,178.961 -120.29,178.961 -120.29,-91.041 ; -115.286,-86.037 264.723,-86.037 264.723,173.957 -115.286,173.957 -115.286,-86.037
  text "1" at -85.289,174.948 h3
  text "2" at -37.994,174.948 h3
  text "3" at 39.705,174.948 h3
  text "4" at 103.713,174.948 h3
  text "5" at 172.724,174.948 h3
  text "6" at 233.71,174.948 h3
  text "A" at -118.283,152.951 h3
  text "A" at 265.714,152.951 h3
  text "B" at 265.714,109.924 h3
  text "B" at -118.283,108.933 h3
  text "C" at -118.283,63.95 h3
  text "C" at 265.714,63.95 h3
  text "D" at -118.283,18.966 h3
  text "D" at 265.714,18.966 h3
  text ".PCB_FILE_NAME_NO_PATH" at 272.543,2.303 h1.52 r90
  text "FILENAME:" at 272.416,-8.365 h1.52 r90
  text "E" at -118.283,-26.042 h3
  text "E" at 265.714,-26.042 h3
  text "SIL3_PCBTEMPLATE_A3.PCB" at 272.67,-40.75 h1.52 r90
  text "TEMPLATE:" at 272.521,-52.72 h1.52 r90
  text "ISSUE" at 115.559,-56.715 h2.01
  text "DATE" at 128.059,-56.715 h2.01
  text "ECN" at 141.559,-56.715 h2.01
  text "DRAWN" at 152.559,-56.715 h2.01
  text "APP" at 179.559,-56.715 h2.01
  text "SIL3 Pty Ltd" at 75.693,-56.752 h2.54
  text "CHECKED" at 164.134,-56.8 h2.01
  text ".SIL3_PROJECT" at 205.106,-57.26 h1.78
  text "PROJECT:" at 190.305,-57.389 h2.01
  text "Factory 10" at 75.541,-60.308 h1.52
  text "R1.0" at 115.16,-62.124 h2.01
  text "PCB DESCRIPTION:" at 190.559,-62.215 h2.01
  text "01.08.12" at 126.259,-62.342 h2.01
  text "LJG" at 153.768,-62.378 h2.01
  text "9-13 Dingley Avenue" at 75.541,-63.229 h1.52
  text "Dandenong, VICTORIA, 3175" at 75.541,-65.769 h1.52
  text ".SIL3_PCB_DESC" at 190.501,-67.166 h2.5
  text "AUSTRALIA" at 75.541,-68.436 h1.52
  text "F" at -118.283,-71.051 h3
  text "F" at 265.714,-71.051 h3
  text "http://www.sil3.com.au" at 75.541,-71.103 h1.52
  text "LAYER" at 243.46,-73.897 h2.01
  text "ASSY. NUMBER:" at 190.501,-74.532 h2.01
  text ".SIL3_LDLREV" at 214.123,-76.056 h3
  text ".DATE_PRINT" at 272.559,-77.215 h1.52 r90
  text "GENERAL TOLERANCE:" at 81.66,-77.831 h1.52
  text "+" at 87.248,-80.498 h1.27
  text "CLASIFFICATION:" at 242.965,-80.883 h2.01
  text "0.2 mm" at 89.788,-81.006 h1.65
  text "SCALE:" at 189.516,-81.033 h2.01
  text "SHEET" at 206.71,-81.033 h2.01
  text "-" at 87.248,-81.641 h1.27
  text "UNLESS OTHERWISE SPECIFIED" at 77.85,-84.054 h1.52
  text "1 OF 1" at 205.36,-84.438 h2.01
  text "NTS" at 190.627,-84.591 h2.01
  text "UNCLASSIFIED" at 244.235,-84.693 h2.03
  text "A3" at 265.559,-89.715 h1.78
  text "1" at -85.289,-90.05 h3
  text "2" at -25.294,-90.05 h3
  text "3" at 39.705,-90.05 h3
  text "4" at 103.713,-90.05 h3
  text "5" at 172.724,-90.05 h3
  text "6" at 233.71,-90.05 h3
  text "PRINT DATE:" at 272.521,-90.66 h1.52 r90

## Text inside footprints (layer, text, board x,y; h text height)
CN8: Top Overlay "J4" at 56.96,57.372 h2; Top Overlay "J3" at 16.34,57.372 h2; Top Overlay "J2" at 59.5,57.372 h2; Top Overlay "J1" at 13.8,57.372 h2
LBL1: Top Overlay "rloop.org" at 5.215,33.135 h1 r90